# Altium PCB SB0037A.PcbDoc (part 6 of 7)
Units mil, origin at the board's own origin, x right, y up, seen from the top; angles counter-clockwise.
Board outline 2872.5 x 4560 mil, 6 copper layers (Top Layer, L2, L3, L4, L5, Bottom Layer), stack 30.268 mil thick; 282 components, 292 nets, 1320 pads, 687 vias.
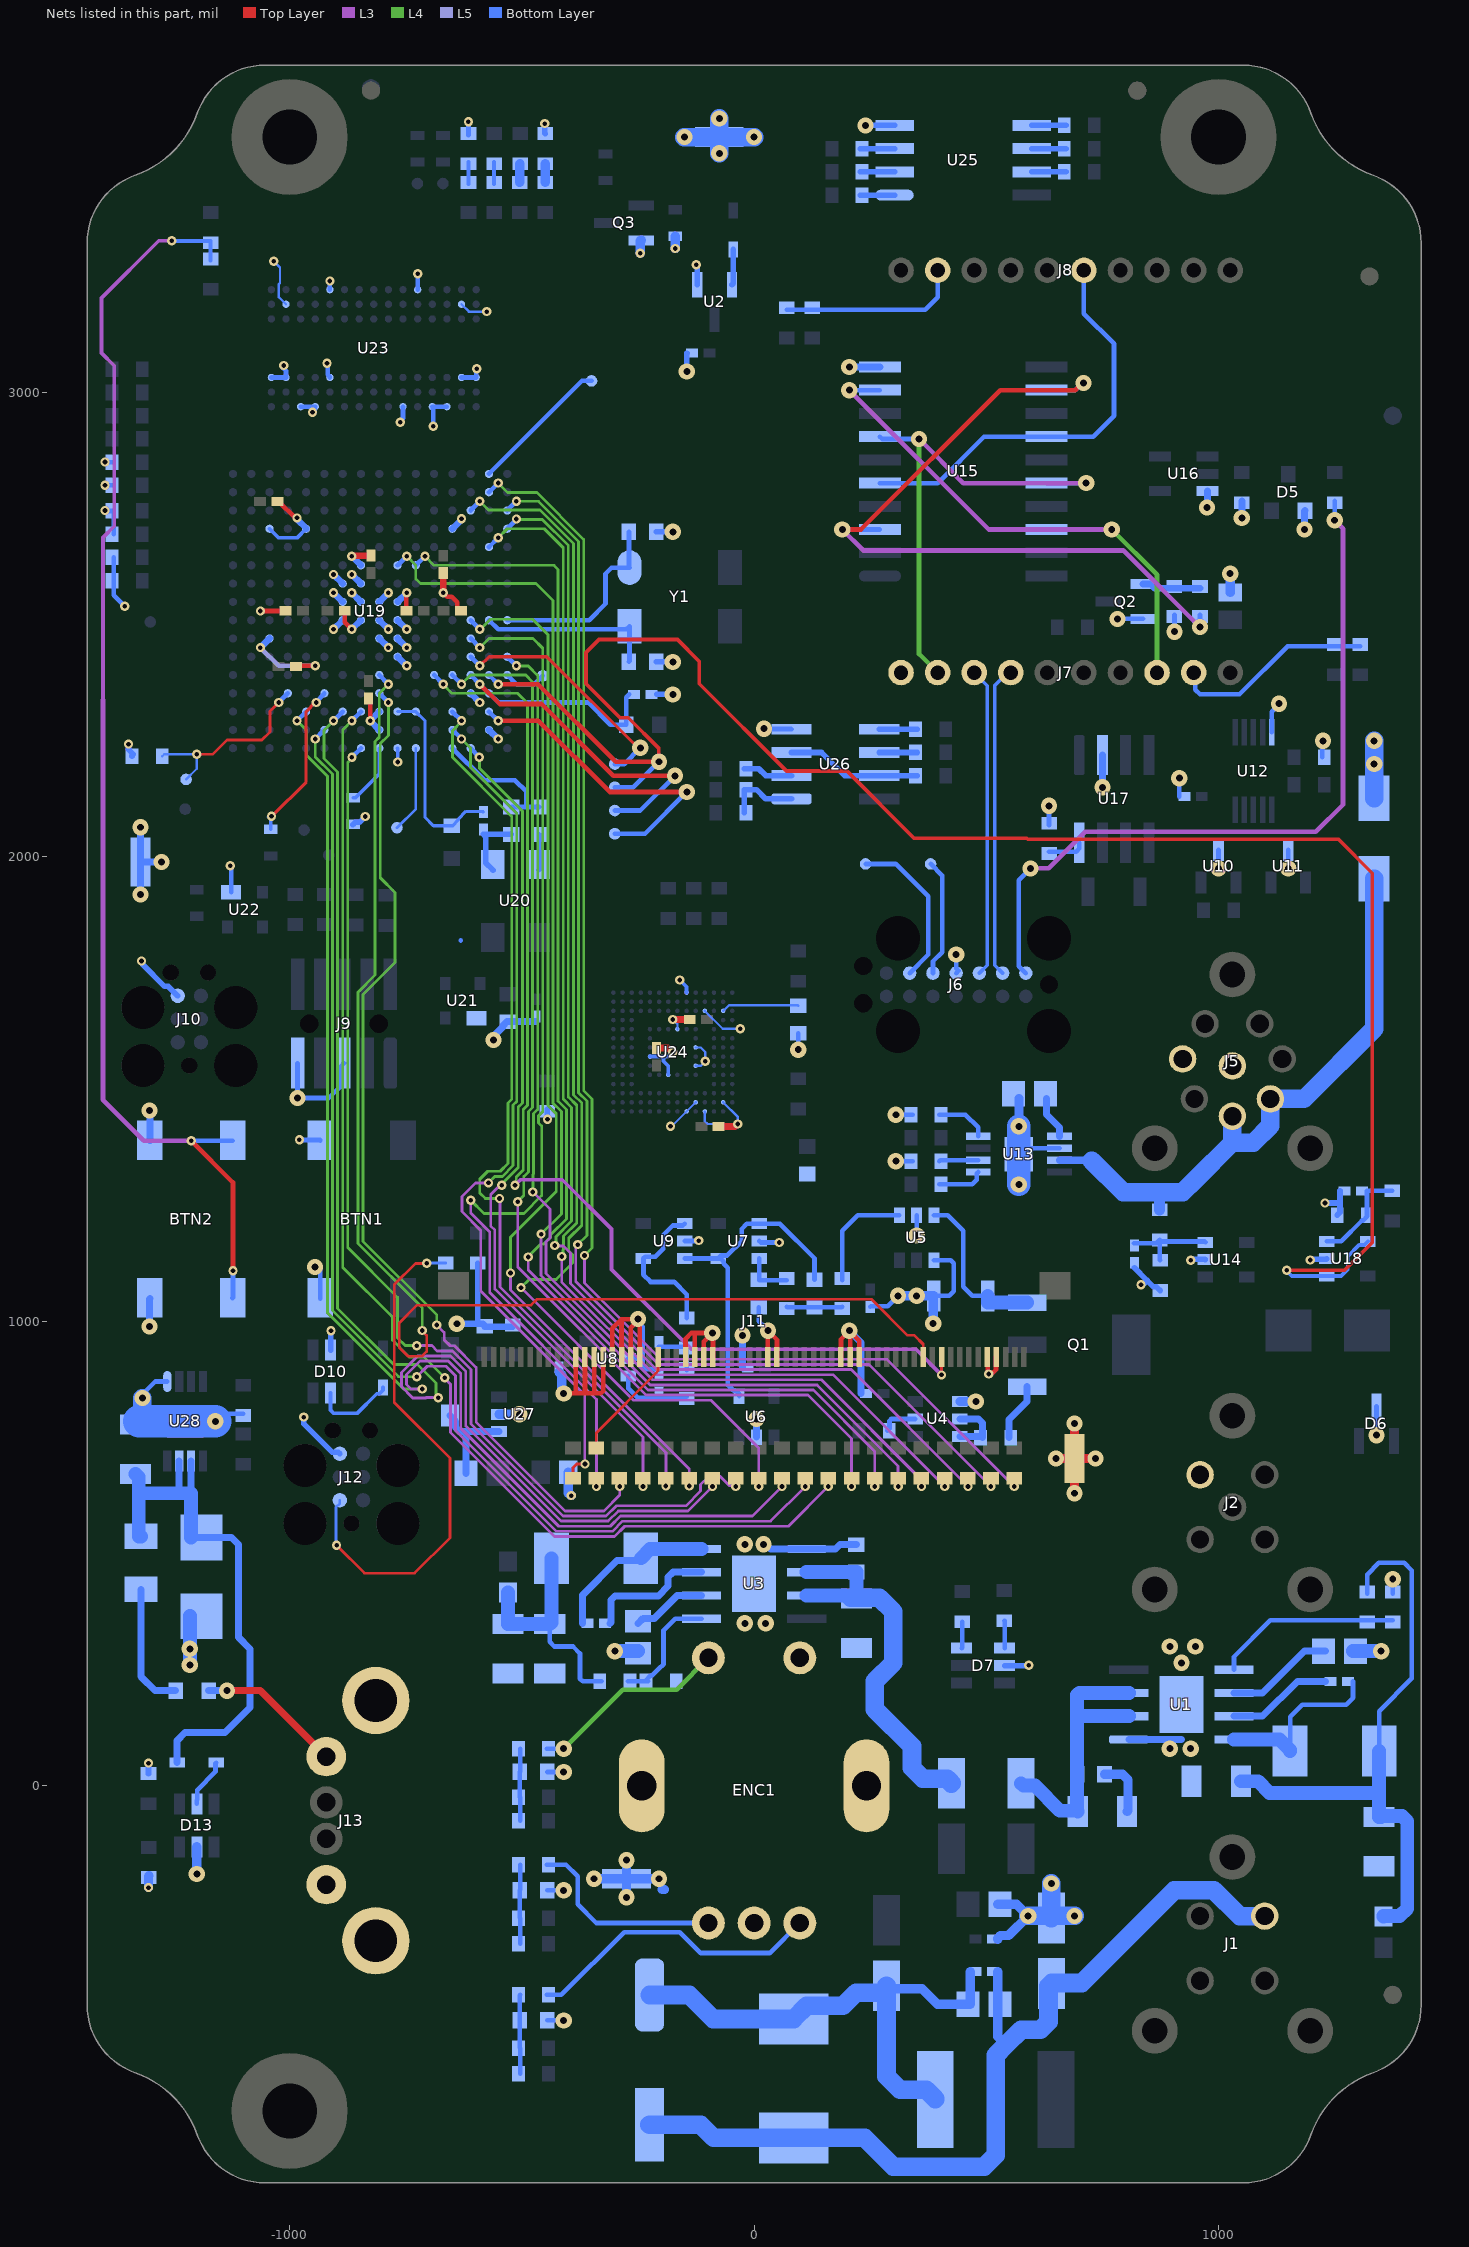
[diagram p8: the nets of this part, all layers, seen from the top]

## Via types
v1: diameter 20, hole 10, Top Layer to Bottom Layer, tented both sides, 484 vias
v2: diameter 35, hole 15, Top Layer to Bottom Layer, tented both sides, 197 vias
v3: diameter 20, hole 10, Top Layer to Bottom Layer, tented top, 6 vias

## Nets (pads, with @x,y where several pads share a name; then routed paths per layer and width w, separated by ;. In a path a pad name is that pad's centre, name@x,y a point inside that pad or via, vN(x,y) a via of type N, cw(c..) or ccw(c..) an arc to the next point about the centre after c; other vN are vias at no path point) (continued)
GND: BTN1.B BTN2.B C5.1 C6.1 C7.1 C8.1 C9.1 C10.1 C11.1 C12.2 C14.1 C15.1 C16.1 C17.1 C18.1 C19.2 C20.2 C21.2 C22.1 C24.2 C25.2 C27.1 C28.1 C29.1 C30.1 C31.1 C32.1 C33.1 C34.1 C35.1 C36.1 C38.1 C39.1 C40.2 C41.1 C42.1 C43.1 C44.1 C45.1 C46.1 C47.1 C48.1 C49.1 C50.1 C51.1 C52.1 C53.1 C54.1 C55.1 C56.1 C57.1 C58.1 C59.1 D4.1 D5.1 D6.3 D7.2 D10.2 D12.1 D13.2 ENC1.2 ENC1.C ENC1.M1 ENC1.M2 J2.2 J5.7 J5.8 J6.11 J7.10 J9.5 J9.9 J10.5 J11.4 J11.5 J11.19 J11.20 J11.21 J11.28 J11.29 J11.35 J11.36 J11.37 J11.38 J11.43 J11.44 J11.45 J11.46 J11.47 J11.48 J11.49 J11.50 J12.5 J13.4 J13.S1 J13.S2 L4.2 Q2.2 Q3.2 R2.1 R4.1 R7.1 R14.2 R17.1 R18.1 R20.2 R37.1 R38.1 R40.1 R44.2 R47.2 R48.2 R50.1 R59.2 R60.2 R61.2 R62.2 R73.1 R74.1 R75.1 R81.1 R82.1 R115.1 R117.1 R119.1 R120.1 R121.1 TP3.1 TP4.1 TP5.1 TP6.1 U1.1 U1.9 U2.1 U3.1 U3.9 U4.4 U5.2 U5.4 U6.2 U7.2 U8.2 U9.2 U10.3 U11.3 U12.5 U13.6 U13.9 U14.2 U15.10 U16.3 U17.2 U18.2 U19.B2 U19.C4 U19.D13 U19.G1 U19.G6 U19.G7 U19.G8 U19.G9 U19.H2 U19.H3 U19.H7 U19.H8 U19.H9 U19.J8 U19.J9 U19.J10 U19.J11 U19.K8 U19.K9 U19.K10 U19.M13 U19.P7 U19.P13 U20.2 U21.1 U22.1 U23.A3 U23.B3 U23.B8 U23.C1 U23.D1 U23.E9 U23.F1 U23.L3 U23.L9 U23.M1 U23.N1 U23.P3 U23.P8 U23.R3 U24.A6 U24.C4 U24.E7 U24.G5 U24.H10 U24.J5 U24.K8 U24.N2 U24.N5 U24.P4 U24.P6 U25.4 U26.4 U27.2 U28.1 U28.9 | length 11184.9
  Top Layer w10: v1(-1062.99,2529.53) -1009.17,2529.53 C43.1@-1008.7,2530 ; C50.1@-1023.35,2765 -988.35,2730 v1(-984.25,2730) ; C49.1@-986.3,2410 -984.88,2411.42 v1(-944.88,2411.42) ; C45.1@-881.3,2530 -881.3,2505.31 v1(-866.14,2490.16) ; C48.1@-830,2341.3 -826.77,2338.07 v1(-826.77,2293.31) ; C46.1@-748.7,2530 -748.7,2568.23 v1(-748.03,2568.9) ; v1(-669.29,2568.9) -660.59,2560.2 -650.92,2560.2 -639.09,2548.37 -639.09,2534.84 -634.25,2530 C47.1@-631.3,2530 C47.1@-630.83,2529.53 ; v2(-410,845) -383.86,845 ; J11.50@-383.86,923.23 -383.86,845 ; J11.49@-364.17,923.23 -364.17,845.83 -365,845 ; J11.48@-344.49,923.23 -344.49,845 ; J11.47@-324.8,923.23 -324.8,850.2 -330,845 -344.49,845 ; J11.46@-305.12,923.23 -305.12,984.88 -285.43,1004.57 ; J11.45@-285.43,923.23 -285.43,1004.57 ; J11.44@-265.75,923.23 -265.75,986.64 -250,1002.39 v2(-250,1005) ; J11.43@-246.06,923.23 -246.06,1001.06 v2(-250,1005) ; J11.38@-147.64,923.23 -147.64,962.36 -135,975 -125,975 ; J11.37@-127.95,923.23 -127.95,972.05 -125,975 ; J11.36@-108.27,923.23 -108.27,956.64 -90,974.91 v2(-90,975) ; J11.35@-88.58,923.23 -88.58,973.58 v2(-90,975) ; J11.29@29.53,923.23 29.53,979.53 v2(30,980) 49.21,960.79 J11.28@49.21,923.23 ; J11.21@187.01,923.23 187.01,961.64 205,979.63 v2(205,980) v2@206.69,978.31 ; J11.20@206.69,923.23 v2@206.69,978.31 ; J11.19@226.38,923.23 226.38,958.62 v2@206.69,978.31 ; J11.5@501.97,923.23 502.87,922.32 502.87,891.63 504.51,889.99 v1@504.51,888.37 ; v1(504.95,886.85) v1@506.03,886.85 ; v1@507.87,885.01 v1@506.03,886.85 ; J11.4@521.65,923.23 520.75,922.32 520.75,895.75 514.11,889.11 512.96,889.11 512.22,888.37 v1@504.51,888.37 ; -383.86,845 -365,845 ; -365,845 -344.49,845 ; -285.43,1004.57 -285,1005 v2(-250,1005) ; -125,975 v2(-90,975) ; v1@504.51,888.37 v1@506.03,886.85
  Top Layer w14: v1(-866.14,2647.64) -865.61,2648.17 -825.53,2648.17 C51.1@-825,2648.7 ; v1(-669.29,2568.9) C44.1@-669.29,2611.22
  Top Layer w15: C54.1@-210,1588.7 -185.05,1588.7 -176.35,1580 v1(-175,1580) ; v1(-175,1650) C55.1@-138.7,1650 ; C53.1@-76.3,1420 -41.35,1420 -36.35,1425 v1(-35,1425)
  Top Layer w20: v2(650,705) TP3.1@690,705 ; v2(690,630) TP3.1@690,705 ; v2(690,780) TP3.1@690,705 ; v2(735,705) TP3.1@690,705
  L5 w10: v1(-1062.99,2450.79) -1023.62,2411.42 v1(-944.88,2411.42)
  Bottom Layer w5: v1(-1034.45,3282.48) -1020.87,3268.9 -1020.87,3236.02 -1023.25,3233.64 -1023.25,3205.33 U23.P8@-1007.87,3189.96 ; U23.B8@-629.92,3189.96 -614.17,3174.21 v1(-575.79,3174.21) ; v1(-180,1420) -177.52,1420 U24.N5@-125.79,1471.73 ; v1(-175,1650) -165.16,1640.16 U24.E7@-165.16,1629.21 ; U24.J5@-125.79,1550.47 -114.53,1550.47 v1(-105,1560) -105,1580 -114.84,1589.84 U24.G5@-125.79,1589.84 ; U24.P4@-106.1,1452.05 -106.1,1431.1 -100,1425 v1(-35,1425) -35,1440 U24.N2@-66.73,1471.73 ; U24.C4@-106.1,1668.58 -67.52,1630 v1(-30,1630)
  Bottom Layer w8: U19.P13@-1043.31,2706.69 -1023.62,2687.01 -984.25,2687.01 U19.M13@-964.57,2706.69 ; U19.G1@-767.72,2234.25 -767.15,2233.68 -767.15,2204.5 v1(-767,2204.35) ; U24.H10@-224.21,1570.16 -195,1570.16 ; U24.K8@-184.84,1530.79 -184.84,1549.84 -195,1560 -195,1570.16 ; v1(-175,1580) -184.84,1570.16 -195,1570.16 ; v1(-160,1735) -145.47,1720.47 U24.A6@-145.47,1707.95
  Bottom Layer w10: v1(-1397.64,2746.06) -1398.94,2746.06 -1400,2745 -1378.54,2745 R60.2@-1378.54,2695 ; v1(-1397.64,2800.2) -1399.8,2800.2 -1400,2800 R82.1@-1378.54,2800 ; v1(-1397.64,2850.39) -1399.61,2850.39 -1400,2850 R47.2@-1378.54,2850 ; R61.2@-1378.54,2645 -1378.54,2563.54 v1(-1355,2540) ; v2@-1325,835 -1289.37,870.63 U28.1@-1263.39,870.63 ; v2(-1160,785) -1158.1,785 -1141.64,801.46 R119.1@-1100,801.46 ; v1(-1128,1981) -1126,1979 U22.1@-1126,1924 ; U23.R3@-1039.37,3032.48 U23.P3@-1007.87,3032.48 -1007.87,3046.61 -1014.81,3053.55 -1012.84,3055.51 v1(-1012.84,3058.22) ; J9.9@-983,1556 v2(-983,1481) -916,1481 -892.5,1504.5 -892.5,1546.5 J9.5@-883,1556 ; v1(-979,1391) -978.47,1390.47 BTN1.B@-934,1390.47 ; U23.N1@-976.38,2969.49 U23.M1@-944.88,2969.49 -945.98,2968.39 v1@-945.98,2957.82 ; v2(-945.33,1117) -939.86,1117 -934,1111.14 BTN1.B@-934,1049 ; v1(-919.74,3063.16) -917.83,3061.25 -917.83,3038.48 -913.39,3034.04 U23.L3@-913.39,3032.48 ; U23.L9@-913.39,3221.46 v1(-913.39,3240.16) ; v1(-761.85,2936.17) -761.85,2938.87 -755.91,2944.82 U23.F1@-755.91,2969.49 ; U23.E9@-724.41,3221.46 v1(-724.41,3255.91) ; v1(-690.94,2927.17) -690.94,2963.46 -691.81,2964.32 -691.81,2968.39 U23.D1@-692.91,2969.49 U23.C1@-661.42,2969.49 ; -631.5,1820 -631.5,1820.41 ; U23.B3@-629.92,3032.48 U23.A3@-598.43,3032.48 -598.43,3052.17 -597.59,3051.33 v1(-597.47,3051.33) ; v1(-615.16,3582.68) -615.08,3582.6 -615.08,3553.62 R73.1@-615,3553.54 ; C32.1@-445.48,-505 v2(-410,-505) ; C31.1@-445.48,-225 v2(-410,-225) ; C30.1@-445.48,30 v2(-410,30) ; U8.2@-270.71,920 -240,920 ; v2(-250,1005) -250,998.24 -240,988.24 -240,920 ; C25.2@-205,895 -206.86,896.86 -231.86,896.86 -240,905 -240,920 ; U9.2@-149.71,1173 -120,1173 v1(-119,1174) ; C22.1@10,1030.48 10,1000 v2(30,980) ; U7.2@11.29,1173 14.29,1170 v1(54,1170) ; v2(21.15,2276.15) 21.73,2275.58 79.94,2275.58 U26.4@80.51,2275 ; v2(95,1585) C56.1@95,1620.48 ; C24.2@250,1031.3 251.7,1033 288,1033 v2(310,1055) ; v2(305,1345) R17.1@341.46,1345 ; v2(305,1445) R18.1@341.46,1445 ; v2(350,1185) U5.2@350,1228.23 ; R7.1@386.93,1055 420,1055 430,1065 430,1125 423.23,1131.77 U5.4@387.4,1131.77 ; J6.11@435,1750 440,1755 435,1760 v2(435,1790) ; U13.9@570,1360 582.79,1372.79 U13.6@657.6,1372.79 ; R40.1@635,2068.54 v2(635,2110) ; v2(782.6,2512.6) Q2.2@837.4,2512.6 ; v2(905,2485) 905,2500 R37.1@905,2521.46 ; C27.1@915.48,2130 v2(915.48,2169.52) ; v2(1000,1975) 1000,1965 U10.3@1000,2015.43 ; U12.5@1114.37,2268.66 1114.37,2312.2 1130,2327.83 v2(1130,2330) ; v2(1150,1975) U11.3@1150,2015.43 ; R14.2@1223.54,2215 1223.54,2248.54 v2(1225,2250) ; v2(1340,755) D6.3@1340,817.4 ; R2.1@1375,413.54 v2(1375,445)
  Bottom Layer w12: v1(-1347,2243) -1347,2231.48 -1337,2221.48 -1340.48,2218 R75.1@-1339.48,2217 ; v1(-1319,1776) -1317.47,1774.47 -1317.47,1769.47 -1269.5,1721.5 -1261.5,1721.5 J10.5@-1241,1701 ; R120.1@-1304,26.48 v1(-1304,49) ; v1(-970,794) -970,780 -908.64,718.64 -895.64,718.64 J12.5@-892,715 ; D10.2@-912,938.26 -911.13,939.13 -911.13,979.87 v1(-911,980) ; R48.2@-864.46,2069 R48.2@-863,2070.46 -859.16,2074.3 -849.7,2074.3 v1(-837,2087) ; C58.1@-595,995 R117.1@-595,1125.52 ; U20.2@-562.21,1971.74 -578,1987.53 -578,2043.48 -582.98,2048.46 C40.2@-523,2048.46 ; v1(-451,3579) -451,3558.48 R74.1@-450,3557.48 ; v1(-445,1435) R81.1@-445,1456.46 ; C36.1@-210.48,2420 v2(-175,2420) ; C35.1@-210.48,2700 v2(-175,2700) ; C41.1@-210,2350 v2(-175,2350) ; v2(-145,3045) -145,3084.54 C12.2@-144.54,3085 ; v1(-124.8,3275) -122.4,3272.6 U2.1@-122.4,3232.4 ; v2(240,3575) U25.4@302.36,3575 ; D7.2@539.26,259 590,259 v1(591,260) ; C29.1@819,1115.48 846.24,1088.24 ; v1(833,1079) 834,1080 838,1080 846.24,1088.24 ; R20.2@874,1066.52 866.22,1074.3 860.18,1074.3 846.24,1088.24 ; v1(940,1132) 941.99,1133.99 970.71,1133.99 U14.2@971.71,1133 ; v1(1197.64,1132.36) 1198.96,1133.68 1231.68,1133.68 U18.2@1233,1135 ; v1(1229,1255) 1261.48,1255 ; R44.2@1255.52,1229 1261.48,1234.96 1261.48,1255 ; C34.1@1261.48,1281 1261.48,1255
  Bottom Layer w14: v1(-1062.99,2450.79) U19.P7@-1043.31,2470.47 ; v1(-984.25,2730) -983.11,2728.85 -983.11,2726.24 -964.57,2707.7 U19.M13@-964.57,2706.69 ; v1(-905.51,2490.16) U19.K8@-885.83,2509.84 ; v1(-905.51,2568.9) U19.K9@-885.83,2549.21 ; v1(-905.51,2608.27) U19.K10@-885.83,2588.58 ; v1(-866.14,2490.16) U19.J8@-846.46,2509.84 ; v1(-866.14,2568.9) U19.J9@-846.46,2549.21 ; v1(-866.14,2608.27) U19.J10@-846.46,2588.58 ; v1(-866.14,2647.64) U19.J11@-846.46,2627.95 ; U19.H2@-807.09,2273.62 v1(-826.77,2293.31) U19.H3@-807.09,2312.99 ; U19.H7@-807.09,2470.47 v1(-787.4,2450.79) ; U19.H8@-807.09,2509.84 v1(-787.4,2490.16) ; U19.H9@-807.09,2549.21 v1(-787.4,2568.9) ; U19.G6@-767.72,2431.1 v1(-748.03,2411.42) ; U19.G7@-767.72,2470.47 v1(-748.03,2450.79) ; U19.G8@-767.72,2509.84 v1(-748.03,2490.16) ; U19.G9@-767.72,2549.21 v1(-748.03,2568.9) ; U19.D13@-649.61,2706.69 -631.07,2725.23 -631.07,2727.35 v1(-629.92,2728.5) ; U19.C4@-610.24,2352.36 v1(-590.55,2332.68) ; U19.B2@-570.87,2273.62 v1(-551.18,2253.94)
  Bottom Layer w15: v2(-1321,1919) TP4.1@-1321,1989 ; v2(-1321,2064) TP4.1@-1321,1989 ; v2(-1302,989) -1302,1048 BTN2.B@-1301,1049 ; v2(-1302,1454) -1301,1453 BTN2.B@-1301,1389 ; v2(-1276,1989) TP4.1@-1321,1989 ; v2(-640,995) -595,995 -584.52,995 -579.52,990 C58.1@-580,989.52 -579.02,988.54 R115.1@-520,988.54 ; v2(-561,1606) -557.17,1609.83 -557.17,1618.31 -540.22,1635.27 -540.22,1637.23 -531.97,1645.48 C39.1@-530,1645.48 C38.1@-470,1645.48 ; v2(-25,970) -24.54,969.54 C20.2@-24.54,900 ; U6.2@5,750.71 v2(5,790) ; v2(20,520) 25.41,520 35.41,510 U3.1@113.19,510 175,510 184.52,519.52 C15.1@220,519.52 ; v2(205,980) 230.46,954.54 C19.2@230.46,845 ; v2(205,3055) U15.10@270.87,3055 ; v2(750,2150) U17.2@750,2219.49 ; U1.1@806.81,100 920,100 ; v2(975,2752.64) 976.18,2753.82 U16.3@976.18,2787.6 ; v2(1050,2730) R38.1@1050,2766.46 ; v2(1185,2705) 1185.51,2705.51 1185.51,2744.09 1185,2744.61 D5.1@1186.02,2745.63
  Bottom Layer w20: v1(-1304,-219) -1304,-194.54 R121.1@-1303,-193.54 ; v2(-1200,-190) D13.2@-1200,-131.26 ; U27.2@-549.29,800 v2(-505,800) ; C21.2@-420,890.46 -414.48,884.95 -414.48,853.54 -410,849.06 v2(-410,845) ; C57.1@-400.47,675 -400,674.53 -400.24,674.29 -400.24,630.24 -395,625 v1(-394,625) ; v2(-345,-200) TP6.1@-275,-200 ; v2(-275,-240) TP6.1@-275,-200 ; v2(-275,-160) TP6.1@-275,-200 ; v1(-245,3300) -245,3326.77 -244.17,3327.6 Q3.2@-242.6,3327.6 ; v2@-200,-200 TP6.1@-275,-200 ; -198,-223 -193,-223 ; v1(-170,3310) R50.1@-170,3336.46 ; v2(310,1055) v2(350,1055) R7.1@386.93,1055 385.64,1053.71 v2(385.64,995.64) ; U4.4@443.23,827.4 v2(477.4,827.4) ; C6.1@524.52,-330 524.52,-328.03 530.27,-322.28 547.72,-322.28 v2(590,-280) 565,-255 C5.1@524.53,-255 ; v2(570,1420) 570.47,1420.47 C28.1@570.47,1480 ; C8.1@754.52,25 793.28,25 805,13.28 805,-53.15 C7.1@803.15,-55 ; C33.1@1025,2569.53 v2(1025,2610)
  Bottom Layer w30: v2(-1215,260) v2(-1215,295) D12.1@-1215,365.71 ; v2(-300,290) -250.47,290 C18.1@-250,290.47 ; C11.1@1289.53,290 v2(1350,290)
  Bottom Layer w40: C59.1@-1317,784.21 v2(-1317,835) ; v2(-150,3550) TP5.1@-75,3550 ; v2(-75,3515) TP5.1@-75,3550 ; v2(-75,3590) TP5.1@-75,3550 ; v2(0,3550) TP5.1@-75,3550 ; v2(590,-280) 635.47,-280 L4.2@640,-284.53 ; v2(640,-210) L4.2@640,-284.53 ; v2(690,-280) 644.53,-280 L4.2@640,-284.53 ; D4.1@1335,2126.61 v2(1335,2200) v2(1335,2250)
  Bottom Layer w50: v2(570,1295) U13.9@570,1360 v2(570,1420)
  Bottom Layer w70: C59.1@-1324.21,785 U28.9@-1225,785 ; U28.9@-1225.08,784.92 U28.9@-1225,785 ; v2(-1160,785) U28.9@-1225,785
  other v1: -950.83,2957.82
  other v2: -205,-200 895,80 940,80 920,265 895,300 950,300 -20,350 25,350 -20,520
GND_IN: C2.2 C3.1 C4.1 D1.1 J1.2 L4.1 | length 1967.1
  Bottom Layer w20: C3.1@524.52,-469.99 C4.1@524.52,-400 ; C3.1@524.53,-470 524.53,-539.53 542.5,-557.5
  Bottom Layer w40: C2.2@-225.24,-730 C2.2@-225,-729.76 -170,-729.76 -115.24,-729.76 -87.05,-757.95 D1.1@85,-757.95 237.95,-757.95 299.95,-819.95 495.05,-819.95 520,-795 520,-580 542.5,-557.5 575,-525 616.57,-525 633.89,-507.68 633.89,-431.58 L4.1@640,-425.47 640.98,-424.49 705.51,-424.49 905,-225 937.01,-225 937.2,-224.8 989.8,-224.8 1045.33,-280.33 J1.2@1099.4,-280.33
HS: J11.41 R114.1 | length 254.9
  Top Layer w6: R114.1@-340,723.54 -340,760 -206.69,893.31 J11.41@-206.69,923.23
LCD_BLUE_0: R106.2 U19.A6 | length 2421.2
  Top Layer w6: R106.2@360,666.46 360,644.92 v1(360.24,644.69)
  L3 w6: v1(-476.4,1278.61) -439.66,1241.87 -439.66,1179.81 -448.15,1171.31 -448.15,1103.45 -219.01,874.31 144.69,874.31 359.84,659.16 359.84,645.08 v1(360.24,644.69)
  L4 w6: v1(-511.81,2411.42) -486.42,2411.42 -466,2391 -466,1456.43 -475,1447.43 -475,1317.22 -476.4,1315.82 v1(-476.4,1278.61)
  Bottom Layer w10: U19.A6@-531.5,2431.1 v1(-511.81,2411.42)
LCD_BLUE_1: R107.2 U19.A13 | length 2800
  Top Layer w6: R107.2@410,666.46 410,645.12 v1(410.43,644.69)
  L3 w6: v1(-414.37,1139.76) -414.37,1085.22 -214.45,885.31 169.81,885.31 v1(410.43,644.69)
  L4 w6: v1(-511.81,2727.75) -510.44,2726.38 -456.12,2726.38 -400,2670.26 -400,1483.33 -382,1465.33 -382,1211.68 -410.15,1183.53 -410.15,1155.57 -411.69,1154.04 -411.69,1142.44 v1(-414.37,1139.76)
  Bottom Layer w10: U19.A13@-531.5,2706.69 -511.81,2726.38 v1(-511.81,2727.75)
LCD_BLUE_2: R108.2 U19.B12 | length 2885
  Top Layer w6: R108.2@460,666.46 460,645.31 v1(460.63,644.69)
  L3 w6: v1@-429.15,1158.76 -425.5,1162.42 -410.15,1162.42 -395.18,1147.44 -395.18,1081.59 -209.9,896.31 209.01,896.31 v1(460.63,644.69)
  L4 w6: v1(-551.18,2687.01) -531.5,2706.69 -451.99,2706.69 -411,2665.7 -411,1478.77 -393,1460.77 -393,1216.24 -426.85,1182.39 -426.85,1172.56 v1@-434.52,1164.89
  Bottom Layer w10: U19.B12@-570.87,2667.32 v1(-551.18,2687.01)
  other v1: -429.15,1163.44
LCD_BLUE_3: R109.2 U19.A14 | length 2906.8
  Top Layer w6: v1(509.84,644.69) 509.84,647.64 510,647.8 R109.2@510,666.46
  L3 w6: v1(-379.94,1165.41) -379.94,1161.62 -384.18,1157.39 -384.18,1086.14 -205.34,907.31 247.22,907.31 v1(509.84,644.69)
  L4 w6: v1(-511.81,2765.75) -464.38,2765.75 -378,2679.37 -378,1492.44 -360,1474.44 -360,1185.35 v1(-379.94,1165.41)
  Bottom Layer w10: U19.A14@-531.5,2746.06 v1(-511.81,2765.75)
LCD_BLUE_4: R110.2 U19.B15 | length 3006
  Top Layer w6: R110.2@560,666.46 560,646.69 560.04,646.65 v1(560.04,644.69)
  L3 w6: v1(-365.18,1141.79) -365.18,1082.7 -200.78,918.31 286.42,918.31 v1(560.04,644.69)
  L4 w6: v1(-551.18,2805.12) -530.81,2784.75 -467.82,2784.75 -367,2683.93 -367,1497 -349,1479 -349,1157.96 v1(-365.18,1141.79)
  Bottom Layer w10: U19.B15@-570.87,2785.43 v1(-551.18,2805.12)
LCD_CS: J11.12 U19.H5 | length 2893.8
  Top Layer w6: v1(-714.57,980.31) -714.57,979.37 -705,969.8 -705,935 -715,925 -745,925 -764,944 -764,996.56 -725.56,1035 -480,1035 -467.39,1047.61 252.39,1047.61 330,970 345,970 364.17,950.83 J11.12@364.17,923.23
  L4 w6: v1(-787.4,2372.05) -807.09,2352.36 -807.09,2257.68 -816,2248.77 -816,1745.56 -852.83,1708.73 -852.83,1167.83 -714.57,1029.57 v1(-714.57,980.31)
  Bottom Layer w10: U19.H5@-807.09,2391.73 v1(-787.4,2372.05)
LCD_DATA_ENABLE: R112.2 U19.C1 | length 1823.8
  Top Layer w6: R112.2@-240,666.46 -240,646.5 -239.17,645.67 v1(-239.17,644.69)
  L3 w6: v1(-543.31,1293.31) -546.56,1293.31 -567.23,1272.63 -567.23,1205.82 -558.24,1196.83 -558.24,1069.95 -239.17,750.88 v1(-239.17,644.69)
  L4 w6: v1(-591.56,2214.67) -591.56,2190.97 -499,2098.41 -499,1470.1 -508,1461.1 -508,1330.89 -543.31,1295.58 v1(-543.31,1293.31)
  Bottom Layer w10: U19.C1@-610.24,2234.25 -610.24,2233.8 -591.56,2215.13 v1(-591.56,2214.67)
LCD_DC: J11.10 U19.E5 | length 2462.2
  Top Layer w6: v1(403.54,884.84) 403.54,888.78 J11.10@403.54,923.23
  L3 w8: v1(-514.79,1293.37) -503.16,1305 -413,1305 -307,1199 -307,1112 -135,940 348.39,940 v1(403.54,884.84)
  L4 w6: v1(-669.29,2372.05) -669.29,2371.06 -650.59,2352.36 -509.01,2352.36 -488,2331.35 -488,1465.54 -497,1456.54 -497,1326.33 -512.11,1311.22 -512.11,1296.05 v1(-514.79,1293.37)
  Bottom Layer w10: U19.E5@-688.98,2391.73 v1(-669.29,2372.05)
LCD_GREEN_0: R100.2 U19.M3 | length 2755.1
  Top Layer w6: R100.2@60,666.46 v1(60.04,644.69) v1(60.04,644.69)
  L3 w6: v1(-714.6,854.37) -738.53,854.37 -748.5,864.35 -748.5,885.65 -719.61,914.54 -658.69,914.54 -631.72,887.57 -631.72,770.05 -420.67,559 -309.69,559 -287.78,580.9 -3.74,580.9 v1(60.04,644.69)
  L4 w6: v1(-984.25,2293.31) -963.88,2272.94 -963.88,2218.88 -918.83,2173.83 -918.83,1018.71 -754.49,854.37 v1(-714.6,854.37)
  Bottom Layer w10: v1(-984.25,2293.31) U19.M3@-964.57,2312.99
LCD_GREEN_1: R101.2 U19.L2 | length 2638.2
  Top Layer w6: R101.2@110,666.46 110,644.92 v1(110.24,644.69)
  L3 w6: v1(-726.21,881.08) -703.74,903.54 -663.25,903.54 -642.72,883.01 -642.72,765.49 -425.23,548 -305.13,548 -283.22,569.9 35.46,569.9 v1(110.24,644.69)
  L4 w6: v1(-944.88,2253.94) -944.88,2215.44 -907.83,2178.38 -907.83,1023.27 -765.63,881.08 v1(-726.21,881.08)
  Bottom Layer w10: v1(-944.88,2253.94) U19.L2@-925.2,2273.62
LCD_GREEN_2: R102.2 U19.J3 | length 2655.5
  Top Layer w6: v1(159.45,644.69) 160,645.24 R102.2@160,666.46
  L3 w6: v1(-666.34,878.94) -666.34,877.31 -653.72,864.69 -653.72,760.94 -429.78,537 -300.57,537 -278.67,558.9 73.67,558.9 v1(159.45,644.69)
  L4 w6: v1(-866,2293.45) -885.83,2273.62 -885.83,1115.96 -779,1009.13 -779,960.05 -741.95,923 -710.4,923 v1(-666.34,878.94)
  Bottom Layer w10: v1(-866,2293.45) U19.J3@-846.46,2312.99
LCD_GREEN_3: R103.2 U19.D5 | length 2464.4
  Top Layer w6: v1(209.65,644.69) 210,645.04 R103.2@210,666.46
  L3 w6: v1(-508.86,1257.87) -508.86,1117.49 -232.68,841.31 116.17,841.31 209.65,747.83 v1(209.65,644.69)
  L4 w6: v1(-629.92,2372.05) -610.23,2391.73 -491.73,2391.73 -477,2377 -477,1460.98 -486,1451.98 -486,1321.78 -495.79,1311.99 -495.79,1271.67 -508.86,1258.61 v1(-508.86,1257.87)
  Bottom Layer w10: U19.D5@-649.61,2391.73 v1(-629.92,2372.05)
LCD_GREEN_4: R104.2 U19.F11 | length 2885
  Top Layer w6: v1(259.84,644.69) 260,644.84 R104.2@260,666.46
  L3 w6: v1(-486.22,1138.78) -486.22,1110.41 -228.12,852.31 127.69,852.31 259.84,720.16 v1(259.84,644.69)
  L4 w6: v1(-708.66,2647.64) -688.97,2627.95 -431.1,2627.95 -422,2618.85 -422,1474.22 -404,1456.22 -404,1220.8 -437.85,1186.95 -437.85,1181.94 -453.16,1166.62 -459.36,1166.62 -486.22,1139.76 v1(-486.22,1138.78)
  Bottom Layer w10: U19.F11@-728.35,2627.95 v1(-708.66,2647.64)
LCD_GREEN_5: R105.2 U19.G11 | length 2883.7
  Top Layer w6: R105.2@310,666.46 v1(310.04,644.69) v1(310.04,644.69)
  L3 w6: v1(-458.66,1187.99) -459.15,1187.5 -459.15,1098.9 -223.57,863.31 135.69,863.31 310.04,688.96 v1(310.04,644.69)
  L4 w6: v1(-748.03,2647.64) -728.35,2627.95 -728.35,2598.43 -718.5,2588.58 -469.49,2588.58 -433,2552.09 -433,1469.66 -415,1451.66 -415,1231.65 v1(-458.66,1187.99)
  Bottom Layer w10: U19.G11@-767.72,2627.95 v1(-748.03,2647.64)
LCD_HSYNC: R114.2 U19.C7 | length 2296.2
  Top Layer w6: R114.2@-340,666.46 -340,645.12 v1(-339.57,644.69)
  L3 w6: v1(-610.24,1260.83) -610.24,1233.27 -569.24,1192.28 -569.24,1061.95 -339.57,832.27 v1(-339.57,644.69)
  L4 w6: v1(-610.24,1260.83) -581.69,1232.28 -495.85,1232.28 -457.4,1270.74 -457.4,1420.53 -464,1427.13 -464,1442.87 -455,1451.87 -455,2449.46 -476.01,2470.47 -570.86,2470.47 v1(-590.55,2450.79)
  Bottom Layer w10: U19.C7@-610.24,2470.47 v1(-590.55,2450.79)
LCD_LE: TP19.1 U19.B16 | length 303.8
  Bottom Layer w10: U19.B16@-570.87,2824.8 -370.67,3025 TP19.1@-350,3025
LCD_PCLK_WR: R111.2 U19.H4 | length 2175.5
  Top Layer w6: R111.2@-290,666.46 -290,645.31 v1(-289.37,644.69)
  L3 w6: v1(-683.1,992.17) -667.32,976.39 -667.32,960.65 -654.22,947.54 -645.02,947.54 -598.43,900.95 -598.43,783.43 -407,592 -323.35,592 -289.37,625.98 v1(-289.37,644.69)
  L4 w6: v1(-787.4,2332.68) -787.4,2261.81 -805,2244.21 -805,1955.13 -773,1923.13 -773,1773 -841.83,1704.17 -841.83,1172.38 -683.1,1013.66 v1(-683.1,992.17)
  Bottom Layer w10: U19.H4@-807.09,2352.36 v1(-787.4,2332.68)
LCD_RED_0: R95.2 U19.D3 | length 1985.5
  Top Layer w6: R95.2@-190,666.46 v1(-189.96,645.67) v1(-189.96,645.67)
  L3 w6: v1(-548.23,1264.76) -547.24,1263.78 -547.24,1074.5 -189.96,717.22 v1(-189.96,645.67)
  L4 w6: v1(-629.92,2293.31) -629.92,2291.34 -649.61,2271.65 -649.61,2214.61 -522,2087 -522,1478.21 -530,1470.21 -530,1340 -546.69,1323.31 -573.64,1323.31 -590.85,1306.1 -590.85,1276.87 -578.74,1264.76 v1(-548.23,1264.76)
  Bottom Layer w10: U19.D3@-649.61,2312.99 v1(-629.92,2293.31)
LCD_RED_1: R96.2 U19.C8 | length 2258.6
  Top Layer w6: R96.2@-140,666.46 -140,645.9 v1(-139.76,645.67)
  L3 w6: v1(-524.61,1104.33) -524.61,1067.42 -139.76,682.58 v1(-139.76,645.67)
  L4 w6: v1(-590.55,2490.16) -589.57,2490.16 -567.91,2511.81 -477.36,2511.81 -444,2478.45 -444,1465.11 -426,1447.11 -426,1279.71 -524.61,1181.1 v1(-524.61,1104.33)
  Bottom Layer w10: U19.C8@-610.24,2509.84 v1(-590.55,2490.16)
LCD_RED_2: R97.2 U19.K3 | length 2699.5
  Top Layer w6: R97.2@-90,666.46 -90,645.12 v1(-89.57,644.69)
  L3 w6: v1(-679.8,835.95) -706.16,835.95 -706.73,835.37 -735.08,835.37 -759.5,859.79 -759.5,890.21 -724.17,925.54 -654.13,925.54 -620.72,892.13 -620.72,774.6 -416.11,570 -314.24,570 -292.34,591.9 -142.35,591.9 v1(-89.57,644.69)
  L4 w6: v1(-905.51,2293.31) -925.88,2272.94 -925.88,2212 -896.83,2182.94 -896.83,1027.83 -776,907 -725,907 -685.2,867.2 -685.2,845.13 -679.8,839.73 v1(-679.8,835.95)
  Bottom Layer w10: v1(-905.51,2293.31) U19.K3@-885.83,2312.99
LCD_RED_3: R98.2 U19.J1 | length 2356.6
  Top Layer w6: R98.2@-40,666.46 -40,645.31 v1(-39.37,644.69)
  L3 w6: v1(-726.38,947.83) -693.9,947.83 -682.61,936.54 -649.58,936.54 -609.72,896.68 -609.72,779.16 -411.56,581 -318.8,581 -296.89,602.9 -146.9,602.9 -115.16,634.65 -115.16,648.62 -97.44,666.34 -72.83,666.34 -52.71,646.21 -40.9,646.21 v1(-39.37,644.69)
  L4 w6: v1(-866,2214.57) -866,2212.88 -874.83,2204.05 -874.83,1158.7 -768,1051.87 -768,964.6 -751.23,947.83 v1(-726.38,947.83)
  Bottom Layer w10: v1(-866,2214.57) v1(-866,2214.57) -846.46,2234.18 U19.J1@-846.46,2234.25
LCD_RED_4: R99.2 U19.C14 | length 2731.1
  Top Layer w6: v1(9.84,644.69) 10,644.84 R99.2@10,666.46
  L3 w6: v1(-501.97,1072.83) -259.44,830.31 -92.83,830.31 9.84,727.63 v1(9.84,644.69)
  L4 w6: v1(-590.55,2765.75) -571.55,2746.75 -460.93,2746.75 -389,2674.82 -389,1487.89 -371,1469.89 -371,1207.13 -399.15,1178.97 -399.15,1151.85 -391,1143.7 -391,1125.73 -426.18,1090.55 -484.25,1090.55 v1(-501.97,1072.83)
  Bottom Layer w10: U19.C14@-610.24,2746.06 v1(-590.55,2765.75)
LCD_VSYNC: R113.2 U19.D2 | length 1870.7
  Top Layer w6: R113.2@-390,666.46 -390,685 -382,693 v1(-364,693)
  L3 w6: v1(-571.85,1298.23) -599.7,1298.23 -629.24,1268.7 -629.24,1236.71 -588.5,1195.98 -588.5,1065.64 -364.79,841.93 -364.79,693.79 v1(-364,693)
  L4 w6: v1(-629.92,2253.94) -610.56,2234.58 -610.56,2193.24 -511,2093.68 -511,1473.65 -519,1465.65 -519,1335.44 -542.14,1312.31 -558.56,1312.31 -571.85,1299.02 v1(-571.85,1298.23)
  Bottom Layer w10: U19.D2@-649.61,2273.62 v1(-629.92,2253.94)
MODEM_CTS: J8.12 R34.2 R35.2 | length 394
  Bottom Layer w10: R34.2@70,3178.54 125,3178.54 368.54,3178.54 395.08,3205.08 J8.12@395.08,3263
MODEM_DTR: J7.9 U15.7 U15.16 | length 1091
  L3 w10: v2(355,2900) 450,2805 v2(715,2805)
  L4 w10: v2(355,2900) 355,2437.08 J7.9@395.08,2397
  Bottom Layer w10: U15.7@270.87,2905 275.87,2900 v2(355,2900) ; U15.16@629.13,2805 v2(715,2805)
MODEM_RTS: J8.16 U15.5 U15.14 | length 904.1
  Bottom Layer w10: U15.5@270.87,2805 395,2805 495,2905 555,2905 U15.14@629.13,2905 730,2905 775,2950 775,3105 710.04,3169.96 J8.16@710.04,3263
MODEM_RX: J7.3 U15.9 U15.18 | length 1244.4
  L3 w10: v2(205,3005) 505,2705 v2(770,2705)
  L4 w10: v2(770,2705) 867.52,2607.48 J7.3@867.52,2397
  Bottom Layer w10: v2(205,3005) U15.9@270.87,3005 ; U15.18@629.13,2705 v2(770,2705)
MODEM_TX: J7.2 R32.1 R33.1 | length 440.6
  Bottom Layer w10: J7.2@946.26,2397 949.64,2393.62 949.64,2360.36 960,2350 1045,2350 1148.54,2453.54 1250,2453.54 R33.1@1305,2453.54
MODEM_USB_D_N: J6.12 J7.8 | length 665.7
  Bottom Layer w8: J7.8@473.82,2397 502,2368.82 502,1767 J6.12@485,1750
MODEM_USB_D_P: J6.13 J7.7 | length 672.2
  Bottom Layer w8: J6.13@535,1750 518,1767 518,2369 546,2397 J7.7@552.56,2397
NetBTN2_A: BTN2.A R65.1 R68.1 | length 2769.3
  Top Layer w10: v1(-1212,1389) -1122,1299 v1(-1122,1109)
  L3 w8: -1402,2338 -1402,2687.81 -1377.64,2712.17 -1377.64,3057.5 -1405.19,3085.05 -1405.19,3203.65 -1282.07,3326.77 v1(-1253.94,3326.77)
  L3 w10: -1402,2338 -1402,1477 -1314,1389 v1(-1212,1389)
  Bottom Layer w8: v1(-1253.94,3326.77) -1253.62,3326.46 -1170,3326.46 -1170.28,3326.18 -1170.28,3283.82 R68.1@-1170,3283.54
  Bottom Layer w10: v1(-1212,1389) BTN2.A@-1123,1389 ; BTN2.A@-1123,1050.47 -1122,1051.47 v1(-1122,1109)
NetC1_1: C1.1 L3.1 U1.8 | length 391.9
  Bottom Layer w10: L3.1@1154,77.5 1154,149 1180,175 1275,175 1289.52,189.52 C1.1@1289.52,225
  Bottom Layer w30: U1.8@1033.19,100 1131.5,100 1154,77.5 L3.1@1154,75
NetC1_2: C1.2 U1.7 | length 228.3
  Bottom Layer w15: U1.7@1033.19,150 1095,150 1170,225 C1.2@1230.46,225
NetC2_1: C2.1 C3.2 C4.2 D1.2 F1.2 L1.1 | length 1144.1
  Bottom Layer w20: L1.1@285,-436.57 361.57,-436.57 395,-470 465.47,-470 C4.2@465.46,-400
  Bottom Layer w40: C2.1@-225,-450.24 -175,-450.24 -139.76,-450.24 -87.95,-502.05 D1.2@85,-502.05 113.41,-473.64 191.36,-473.64 219.49,-445.51 276.06,-445.51 L1.1@285,-436.57 ; L1.1@285,-430.47 L1.1@285,-436.57 ; F1.2@390.08,-675 390.08,-673.51 370.71,-654.14 314.14,-654.14 285,-625 L1.1@285,-436.57
NetC7_2: C7.2 C8.2 L2.2 U1.2 U1.3 | length 620.5
  Bottom Layer w30: L2.2@575,5.47 579.94,0.53 604.47,0.53 658.61,-53.61 C7.2@695.46,-53.61 ; C7.2@696.85,-55 C7.2@695.46,-53.61 ; U1.2@806.81,150 695.46,150 ; U1.3@806.81,200 700,200 695.46,195.46 695.46,150 ; C7.2@695.46,-53.61 C8.2@695.46,25 695.46,150
NetC9_2: C9.2 C10.2 J3.1 L3.2 R1.2 | length 1330.6
  Bottom Layer w10: R1.2@1320,413.54 1320,455 1345,480 1400,480 1416.25,463.75 1416.25,231.25 1346,161 L3.2@1346,75
  Bottom Layer w30: C9.2@1048.15,10 1085,10 1110,-15 1345,-15 ; C10.2@1345,-66.85 1345,-15 ; L3.2@1346,75 1345,74 1345,-15 ; C10.2@1350,-66.85 1351.85,-65 1395,-65 1406.25,-76.25 1406.25,-263.96 1389.64,-280.57 1355,-280.57 J3.1@1355,-281.53
NetC11_2: C11.2 U1.6 | length 234.6
  Bottom Layer w15: U1.6@1033.19,200 1095,200 1185,290 C11.2@1230.47,290
NetC13_1: C13.1 L6.1 U3.8 | length 358
  Bottom Layer w15: C13.1@-369.52,350 -369.52,410.48 -295.21,484.79 -249.21,484.79 L6.1@-244,490
  Bottom Layer w30: L6.1@-244,490 -224,510 U3.8@-113.19,510
NetC13_2: C13.2 U3.7 | length 282.9
  Bottom Layer w15: C13.2@-310.46,350 -308.57,351.89 -308.57,400.21 -299.78,409 -206,409 -185,430 -185,450 -175,460 U3.7@-113.19,460
NetC14_2: C14.2 C15.2 L5.2 U3.2 U3.3 | length 837.6
  Bottom Layer w30: U3.3@113.19,410 C14.2@196.34,410 ; U3.2@113.19,460 C15.2@220,460 ; C14.2@220,403.15 220,405 C15.2@220,460.46
  Bottom Layer w40: C14.2@208.19,405 220,405 269.72,405 300,374.72 300,265 260,225 260,165 340,85 340,38.94 363.43,15.51 416.06,15.51 424.53,7.04 424.53,5 L5.2@425,5.47
NetC16_2: C16.2 C17.2 J4.1 L6.2 R3.2 | length 518.4
  Bottom Layer w10: C16.2@-440,348.15 -440,310 -430,300 -390,300 -375,285 -375,230.86 -369.14,225 R3.2@-328.54,225
  Bottom Layer w30: J4.1@-530,416.53 C17.2@-530,348.15 C16.2@-440,348.15 -436,352.15 L6.2@-436,490
NetC18_2: C18.2 U3.6 | length 161.9
  Bottom Layer w15: C18.2@-250,349.53 -238.71,360.81 -214.19,360.81 -165.59,409.41 -113.79,409.41 U3.6@-113.19,410
NetC22_2: C22.2 R8.2 U7.3 | length 106.2
  Bottom Layer w10: U7.3@11.29,1135.6 10.99,1135.3 10.99,1088.54 R8.2@70,1088.54
NetC23_1: C23.1 U6.4 U7.1 U7.4 U9.3 | length 723.9
  Bottom Layer w10: U9.3@-149.71,1135.6 U7.4@-77.29,1135.6 ; U6.4@-32.4,839.29 -32.4,844.21 -39.21,851.02 -44.13,851.02 -57,863.89 -57,1115.31 -65.56,1123.87 -65.56,1128.79 -72.37,1135.6 U7.4@-77.29,1135.6 ; C23.1@130,1089.52 130,1136 55.6,1210.4 U7.1@11.29,1210.4 -15.6,1210.4 -27,1199 -27,1173 -58,1142 -70.89,1142 U7.4@-77.29,1135.6
NetC23_2: C23.2 R8.1 R9.2 | length 120.8
  Bottom Layer w10: R8.1@70,1031.46 70.99,1030.46 C23.2@130,1030.46 189.01,1030.46 R9.2@190,1031.46
NetC25_1: C25.1 R10.2 U8.3 | length 161.6
  Bottom Layer w10: U8.3@-270.71,882.6 -270.71,855.71 -250.94,835.94 -205,835.94 -203.03,837.91 R10.2@-145,837.91
NetC26_1: C26.1 R10.1 R11.2 | length 111.9
  Bottom Layer w10: C26.1@-205,945.48 -145.97,945.48 -145,946.46 R10.1@-145,895
NetC28_2: C28.2 U13.5 | length 93.2
  Bottom Layer w15: C28.2@629.53,1480 629.53,1445.47 657.6,1417.4 U13.5@657.6,1398.39
NetC29_2: C29.2 R19.1 R20.1 U14.3 | length 198.5
  Bottom Layer w10: C29.2@817.82,1168 865.48,1168 R19.1@873,1175.52 ; R20.1@874,1131.48 873,1132.48 873,1171.96 970.15,1171.96 U14.3@971.71,1170.4
NetC30_2: C30.2 R21.2 R24.1 R25.2 | length 155.8
  Bottom Layer w10: R21.2@-503.54,-75 -503.54,-25 -504.54,-24.01 C30.2@-504.54,30 -503.54,30.99 R25.2@-503.54,80
NetC31_2: C31.2 R22.1 R26.1 R27.2 | length 170.8
  Bottom Layer w10: R27.2@-503.54,-340 -503.54,-285 -504.54,-284.01 C31.2@-504.54,-225 -503.54,-224.01 R26.1@-503.54,-170
NetC32_2: C32.2 R23.1 R28.1 R29.2 | length 170.8
  Bottom Layer w10: R29.2@-503.54,-620 -503.54,-565 -504.54,-564.01 C32.2@-504.54,-505 -504.54,-450.99 R28.1@-503.54,-450
NetC34_2: C34.2 R41.1 R44.1 U18.3 | length 219.7
  Bottom Layer w10: U18.3@1233,1172.4 1263.88,1172.4 1308.75,1217.27 1311.7,1217.27 1320.48,1226.05 1319.54,1226.99 1319.54,1281 1373.52,1281 R41.1@1374,1281.48
NetC35_2: C35.2 U19.A8 Y1.1 | length 425.7
  Bottom Layer w10: U19.A8@-531.5,2509.84 -355.16,2509.84 -320,2545 -320,2610 -307.01,2622.99 Y1.1@-268.27,2622.99 -269.54,2624.26 C35.2@-269.54,2700
NetC36_2: C36.2 U19.B8 Y1.4 | length 391.1
  Bottom Layer w10: U19.B8@-570.87,2509.84 -551.18,2490.16 -275.12,2490.16 Y1.4@-268.27,2497.01 -268.27,2421.27 C36.2@-269.54,2420
NetC37_1: C37.1 U20.3 | length 77.1
  Bottom Layer w10: U20.3@-463.79,1971.74 -463,1972.53 C37.1@-463,2048.48
NetC37_2: C37.2 C40.1 U19.D1 | length 291.1
  Bottom Layer w10: U19.D1@-649.61,2234.25 -580.35,2165 -515,2165 -490,2140 -490,2107.54 ; C40.1@-523,2107.52 -490,2107.54 ; C37.2@-463,2107.54 -490,2107.54
NetC41_2: C41.2 L7.1 U19.B4 | length 391
  Bottom Layer w10: U19.B4@-570.87,2352.36 -551.18,2332.68 -357.68,2332.68 -310,2285 L7.1@-275.43,2285 -275.43,2343.62 C41.2@-269.06,2350
NetC42_2: C42.2 L8.1 U19.F3 U19.G3 | length 422.4
  Bottom Layer w7: U19.G3@-767.72,2312.99 U19.F3@-728.35,2312.99 -708.66,2293.31 -708.66,2085.66 -690.43,2067.43 L8.1@-651,2067.43 -649.03,2067.43 -636.78,2079.68 -636.78,2081.65 -620.43,2098 -584.3,2098 C42.2@-583,2096.7
NetC56_2: C56.2 U24.C2 | length 167.4
  Bottom Layer w5: U24.C2@-66.73,1668.58 -66.34,1668.58 -54.02,1680.91 93.63,1680.91 C56.2@95,1679.54
NetC59_2: C59.2 D11.1 D12.2 F2.2 U28.6 U28.7 | length 1193.3
  Bottom Layer w15: D11.1@-1242.13,49.99 -1242.13,97.87 -1225,115 -1139,115 -1085,169 -1085,295 -1110,320 -1110,520 -1125,535 D12.2@-1212.21,535 ; -1237.8,630 U28.7@-1237.8,699.37 ; -1212.21,630 U28.6@-1212.21,699.37
  Bottom Layer w30: C59.2@-1331.65,671.85 -1325,665.2 -1325,630 ; F2.2@-1320,537.09 -1325,537.09 -1325,630 ; D12.2@-1212.21,535 -1212.21,630 -1237.8,630 -1325,630
NetD2_1: D2.1 U2.2 | length 76.6
  Bottom Layer w12: U2.2@-47.6,3232.4 -44.99,3235 D2.1@-44.99,3307.87
NetD4_2: D4.2 J5.4 J5.5 R19.2 U13.7 | length 1303.4
  Bottom Layer w16: U13.7@657.6,1347.2 725.8,1347.2 727,1346
  Bottom Layer w24: 872,1278.48 873,1277.48 R19.2@873,1240.48
  Bottom Layer w40: 727,1346 794.52,1278.48 872,1278.48 923.08,1278.48 948.62,1304.02 1029.8,1385.2 J5.5@1029.8,1441.78 ; 1030,1385 1075,1385 1111.51,1421.51 J5.4@1111.51,1479.02 1184.02,1479.02 1335,1630 D4.2@1335,1953.39
NetD7_1: D7.1 R63.1 | length 59.2
  Bottom Layer w10: R63.1@539,355.52 539.26,355.26 D7.1@539.26,296.4
NetD7_6: D7.6 R64.1 | length 57.6
  Bottom Layer w10: D7.6@446.74,296.4 448,297.66 R64.1@448,353.52
NetD8_1: D8.1 L9.2 U27.1 | length 217.8
  Bottom Layer w15: D8.1@-655,797.16 -642.81,784.98 -642.81,771.39 -634.03,762.6 -620,762.6 ; L9.2@-620.45,673 -620.45,762.15 -620,762.6 ; U27.1@-549.29,762.6 -620,762.6
NetD9_2: D9.2 D10.5 | length 179.5
  Bottom Layer w8: D10.5@-912,845.74 -912,809 -905,802 -854.88,802 -812.68,844.2 -806.39,844.2 -799.01,851.58 D9.2@-799.01,857.87
NetD11_2: D11.2 D13.5 | length 106.2
  Bottom Layer w10: D13.5@-1200,-38.74 -1200,-35.93 -1200,-30.73 -1199.05,-29.79 -1199.05,-9.05 -1159.78,30.22 -1159.78,48.09 D11.2@-1157.87,49.99
NetENC1_1: ENC1.1 R25.1 | length 429
  L4 w10: v2(-410,80) -283,207 -167.02,207 ENC1.1@-98.43,275.59
  Bottom Layer w10: R25.1@-446.46,80 v2(-410,80)
NetENC1_A: ENC1.A R26.2 | length 435.1
  Bottom Layer w10: R26.2@-446.46,-170 -405,-170 -380,-195 -380,-255 -339.72,-295.28 ENC1.A@-98.43,-295.28
NetENC1_B: ENC1.B R28.2 | length 646.2
  Bottom Layer w10: R28.2@-446.46,-450 -415,-450 -280,-315 -160,-315 -115,-360 33.7,-360 ENC1.B@98.42,-295.28
NetF2_1: F2.1 L10.2 | length 274.9
  Bottom Layer w15: F2.1@-1320,422.91 -1320,235 -1290,205 L10.2@-1245.43,205
NetJ6_9: J6.9 TP8.1 | length 345.6
  Bottom Layer w10: TP8.1@240,1985 305,1985 375,1915 375,1790 J6.9@335,1750
NetJ6_10: J6.10 TP7.1 | length 253.6
  Bottom Layer w10: TP7.1@380,1985 405,1960 405,1795 385,1775 J6.10@385,1750
NetJ6_14: J6.14 R30.2 | length 1639.4
  L3 w10: v2(595,1975) 595.48,1975.48 634.48,1975.48 713,2054 1209,2054 1268,2113 1268,2706.64 1250,2724.64 v2(1250,2725)
  Bottom Layer w10: J6.14@585,1750 570,1765 570,1950 591.62,1971.62 v2(595,1975) v2@595,1968.24 ; v2(1250,2725) R30.2@1250,2766.46
NetJ12_1: J12.1 R116.1 | length 1126
  Top Layer w6: v1(-899,518) -839,458 -731,458 -655,534 -655,706 -775,826 -775,1079 -729,1125 v1(-705,1125)
  Bottom Layer w6: v1(-899,518) -900,519 -900,600.24 -892,608.24 J12.1@-892,615 ; v1(-705,1125) -704.48,1125.52 R116.1@-664,1125.52
NetJ13_1: J13.1 L10.1 | length 312.3
  Top Layer w15: v2(-1135,205) -1063.33,205 J13.1@-921.18,62.84
  Bottom Layer w15: L10.1@-1174.57,205 v2(-1135,205)
NetQ1_1: Q1.1 R5.1 | length 125.7
  Bottom Layer w15: R5.1@548.54,750 548.54,788.54 587.79,827.79 Q1.1@587.79,859.45
NetQ1_3: Q1.3 R7.2 U5.3 | length 356.8
  Bottom Layer w10: U5.3@387.4,1228.23 416.77,1228.23 450,1195 450,1075 470,1055 R7.2@503.07,1055
  Bottom Layer w30: R7.2@503.07,1055 503.07,1040.79 503.31,1040.55 Q1.3@587.79,1040.55
NetQ2_1: Q2.1 R36.1 R37.2 | length 126.3
  Bottom Layer w15: Q2.1@837.4,2587.4 854.13,2587.4 862.99,2578.54 905,2578.54 R36.1@960,2578.54
NetR1_1: R1.1 R2.2 U1.5@1033.19,250 | length 402.4
  Bottom Layer w10: U1.5@1033.19,250 1033.19,278.19 1111.46,356.46 1320,356.46 R2.2@1375,356.46
NetR3_1: R3.1 R4.2 U3.5@-113.19,360 | length 262.6
  Bottom Layer w10: R3.1@-271.46,225 R4.2@-228.54,225 ; R4.2@-232.48,225 -232.48,227.95 -223.7,236.73 -220.27,236.73 -205,252 -195,262 -195,335 -170,360 U3.5@-113.19,360
NetR5_2: R5.2 U4.5 U4.6 | length 132.3
  Bottom Layer w15: U4.6@443.23,752.6 489.11,752.6 R5.2@491.46,750.26 ; U4.5@443.23,790 482.67,790 491.46,781.21 R5.2@491.46,750.26 ; R5.2@491.46,750 R5.2@491.46,750.26
NetR6_2: R6.2 U4.2 | length 80
  Bottom Layer w10: R6.2@287.09,765 291.45,769.37 291.45,786.45 295,790 U4.2@346.77,790
NetR9_1: R9.1 U5.1 | length 242.8
  Bottom Layer w10: R9.1@190,1088.54 190,1195 223.23,1228.23 U5.1@312.6,1228.23
NetR11_1: R11.1 U9.1 U9.4 | length 333.8
  Bottom Layer w10: U9.1@-149.71,1210.4 -153.64,1206.47 -175.53,1206.47 -196,1186 -196,1156 -212.47,1139.53 -234.36,1139.53 U9.4@-238.29,1135.6 -238.29,1100.29 -223,1085 -172,1085 -145,1058 R11.1@-145,1007.48
NetR16_2: R16.2 U13.1 | length 103.2
  Bottom Layer w10: R16.2@398.54,1295 470,1295 479.6,1304.6 479.6,1318.81 U13.1@482.4,1321.61
NetR17_2: R17.2 U13.2 | length 84.8
  Bottom Layer w10: R17.2@398.54,1345 400.75,1347.2 U13.2@482.4,1347.2
NetR18_2: R18.2 U13.4 | length 114.4
  Bottom Layer w10: R18.2@398.54,1445 455,1445 482.4,1417.6 U13.4@482.4,1398.39
NetR36_2: R36.2 U15.3 U15.12 | length 1701.1
  Top Layer w10: v2(190,2705) 230,2705 530,3005 690.99,3005 706.64,3020.65 v2(709.35,3020.65)
  L3 w10: v2(190,2705) 235,2660 795,2660 v2(960,2495)
  Bottom Layer w10: v2(190,2705) U15.3@270.87,2705 ; U15.12@629.13,3005 690.99,3005 706.64,3020.65 v2(709.35,3020.65) ; v2(960,2495) R36.2@960,2521.46
NetR40_2: R40.2 U17.8 | length 80.1
  Bottom Layer w10: R40.2@635,2011.46 693.19,2011.46 700,2018.27 U17.8@700,2030.51
NetR45_1: R45.1 U19.L4 | length 347.5
  Top Layer w7: v1(-1039.15,2087.85) -1038.15,2087.85 -964.75,2161.25 -964.75,2312.81 -944.88,2332.68 v1(-943,2332.68)
  Bottom Layer w7: v1@-1046.03,2086 v1@-1041,2086 ; R45.1@-1041,2059.54 v1@-1041,2086 ; v1(-1039.15,2087.85) v1@-1041,2086
  Bottom Layer w10: v1(-943,2332.68) -943,2333.62 -925.2,2351.42 U19.L4@-925.2,2352.36
NetR48_1: R48.1 U19.H1 | length 132.8
  Bottom Layer w8: R48.1@-863,2127.54 -858.08,2127.54 -807.09,2178.53 U19.H1@-807.09,2234.25
NetR66_1: R66.1 R70.1 | length 47.9
  Bottom Layer w8: R70.1@-560,3448.54 R66.1@-560,3496.46
NetR67_1: R67.1 R71.1 | length 40.5
  Bottom Layer w20: R71.1@-505,3452.48 -504.5,3452.98 -504.5,3492.02 R67.1@-504,3492.52
NetR69_1: R69.1 R73.2 | length 47.9
  Bottom Layer w8: R69.1@-615,3448.54 R73.2@-615,3496.46
NetR72_1: R72.1 R74.2 | length 40
  Bottom Layer w20: R72.1@-450,3452.48 R74.2@-450,3492.52
NetR75_2: R75.2 TP18.1 U19.N4 | length 416.6
  Top Layer w6: v1(-1200,2221.26) -1199.74,2221 -1166,2221 -1135,2252 -1060,2252 -1042.62,2269.38 -1042.62,2313.68 v1(-1023.62,2332.68)
  Bottom Layer w5: R75.2@-1274.52,2217 -1270.26,2221.26 v1(-1200,2221.26) -1200,2190 TP18.1@-1223,2167
  Bottom Layer w10: v1(-1023.62,2332.68) U19.N4@-1003.94,2352.36
NetR83_1: R83.1 U25.1 | length 73.8
  Bottom Layer w12: R83.1@228.54,3425 U25.1@302.36,3425
NetR84_1: R84.1 U25.6 | length 73.8
  Bottom Layer w12: U25.6@597.64,3525 R84.1@671.46,3525
NetR85_1: R85.1 U25.5 | length 73.8
  Bottom Layer w12: U25.5@597.64,3575 R85.1@671.46,3575
NetR86_1: R86.1 U25.2 | length 73.8
  Bottom Layer w12: R86.1@228.54,3475 U25.2@302.36,3475
NetR87_1: R87.1 U25.3 | length 73.8
  Bottom Layer w12: R87.1@228.54,3525 U25.3@302.36,3525
NetR88_1: R88.1 U25.7 | length 73.8
  Bottom Layer w12: U25.7@597.64,3475 R88.1@671.46,3475
NetR89_2: R89.2 R94.1 U26.1 | length 160.3
  Bottom Layer w12: R89.2@-21.46,2095 -21.46,2145 5,2145 25,2125 U26.1@80.51,2125
NetR90_1: R90.1 U26.3 U26.7 | length 291.7
  Bottom Layer w12: U26.3@80.51,2225 145,2225 195,2175 U26.7@269.49,2175 R90.1@351.46,2175
NetR91_1: R91.1 U26.2 | length 108.2
  Bottom Layer w12: R91.1@-21.46,2190 10,2190 25,2175 U26.2@80.51,2175
NetR92_1: R92.1 U26.5 | length 82
  Bottom Layer w12: U26.5@269.49,2275 R92.1@351.46,2275
NetR93_1: R93.1 U26.6 | length 82
  Bottom Layer w12: U26.6@269.49,2225 R93.1@351.46,2225
NetTP9_1: TP9.1 U18.1 U18.4 U19.B5 | length 4044.6
  Top Layer w8: v2(-205,2205) -205.61,2205.61 -205.61,2234.5 -271.04,2299.93 -288.82,2299.93 -362,2373.11 -362,2440 -334,2468 -165,2468 -118,2421 -118,2373 70,2185 200,2185 345,2040 587,2040 589,2038 1258,2038 1331,1965 1331,1170 1271,1110 v1(1147,1110)
  Top Layer w10: v1(-551.18,2372.05) -465.28,2372.05 -298.24,2205 v2(-205,2205)
  Bottom Layer w8: v1(1147,1110) 1148,1109 1148,1107 1157.4,1097.6 U18.1@1233,1097.6 1263.6,1097.6 1278,1112 1278,1140 1302.59,1164.59 1313.77,1164.59 U18.4@1321.58,1172.4
  Bottom Layer w10: U19.B5@-570.87,2391.73 v1(-551.18,2372.05) ; TP9.1@-300,2150 -260,2150 v2(-205,2205)
NetTP10_1: TP10.1 U19.C6 | length 532.4
  Top Layer w7: v1(-590.55,2411.42) -570.68,2431.29 -446.29,2431.29 -250,2235 v2(-245,2235)
  Bottom Layer w10: U19.C6@-610.24,2431.1 v1(-590.55,2411.42) ; TP10.1@-300,2200 -280,2200 v2(-245,2235)
NetTP11_1: TP11.1 U19.B3 | length 689.8
  Top Layer w10: v1(-551.18,2293.31) -464.52,2293.31 -311.21,2140 v2(-145,2140)
  Bottom Layer w10: U19.B3@-570.87,2312.99 v1(-551.18,2293.31) ; TP11.1@-300,2050 -235,2050 v2(-145,2140)
NetTP12_1: TP12.1 U19.A5 | length 92.1
  Bottom Layer w10: U19.A5@-531.5,2391.73 -511.81,2372.05 -472.95,2372.05 TP12.1@-455,2390
NetTP13_1: TP13.1 U19.C5 | length 690.6
  Top Layer w10: v1(-590.55,2372.05) -547.81,2329.31 -457.31,2329.31 -303,2175 -170.48,2175 v2(-170.24,2174.76)
  Bottom Layer w10: U19.C5@-610.24,2391.73 v1(-590.55,2372.05) ; TP13.1@-300,2100 -245,2100 v2(-170.24,2174.76)
NetTP14_1: TP14.1 U19.F1 | length 188.1
  Bottom Layer w6: TP14.1@-769,2063 -728.35,2103.65 U19.F1@-728.35,2234.25